# Altium PCB PANEL.PcbDoc
Units mm, origin at the board's own origin, x right, y up, seen from the top; angles counter-clockwise.
Board outline 149.8 x 132.8 mm, 4 copper layers (Top Layer, Int1 (GND), Int2 (GND), Bottom Layer), stack 1.583 mm thick; 3 components, 0 nets, 155 pads, 0 vias.
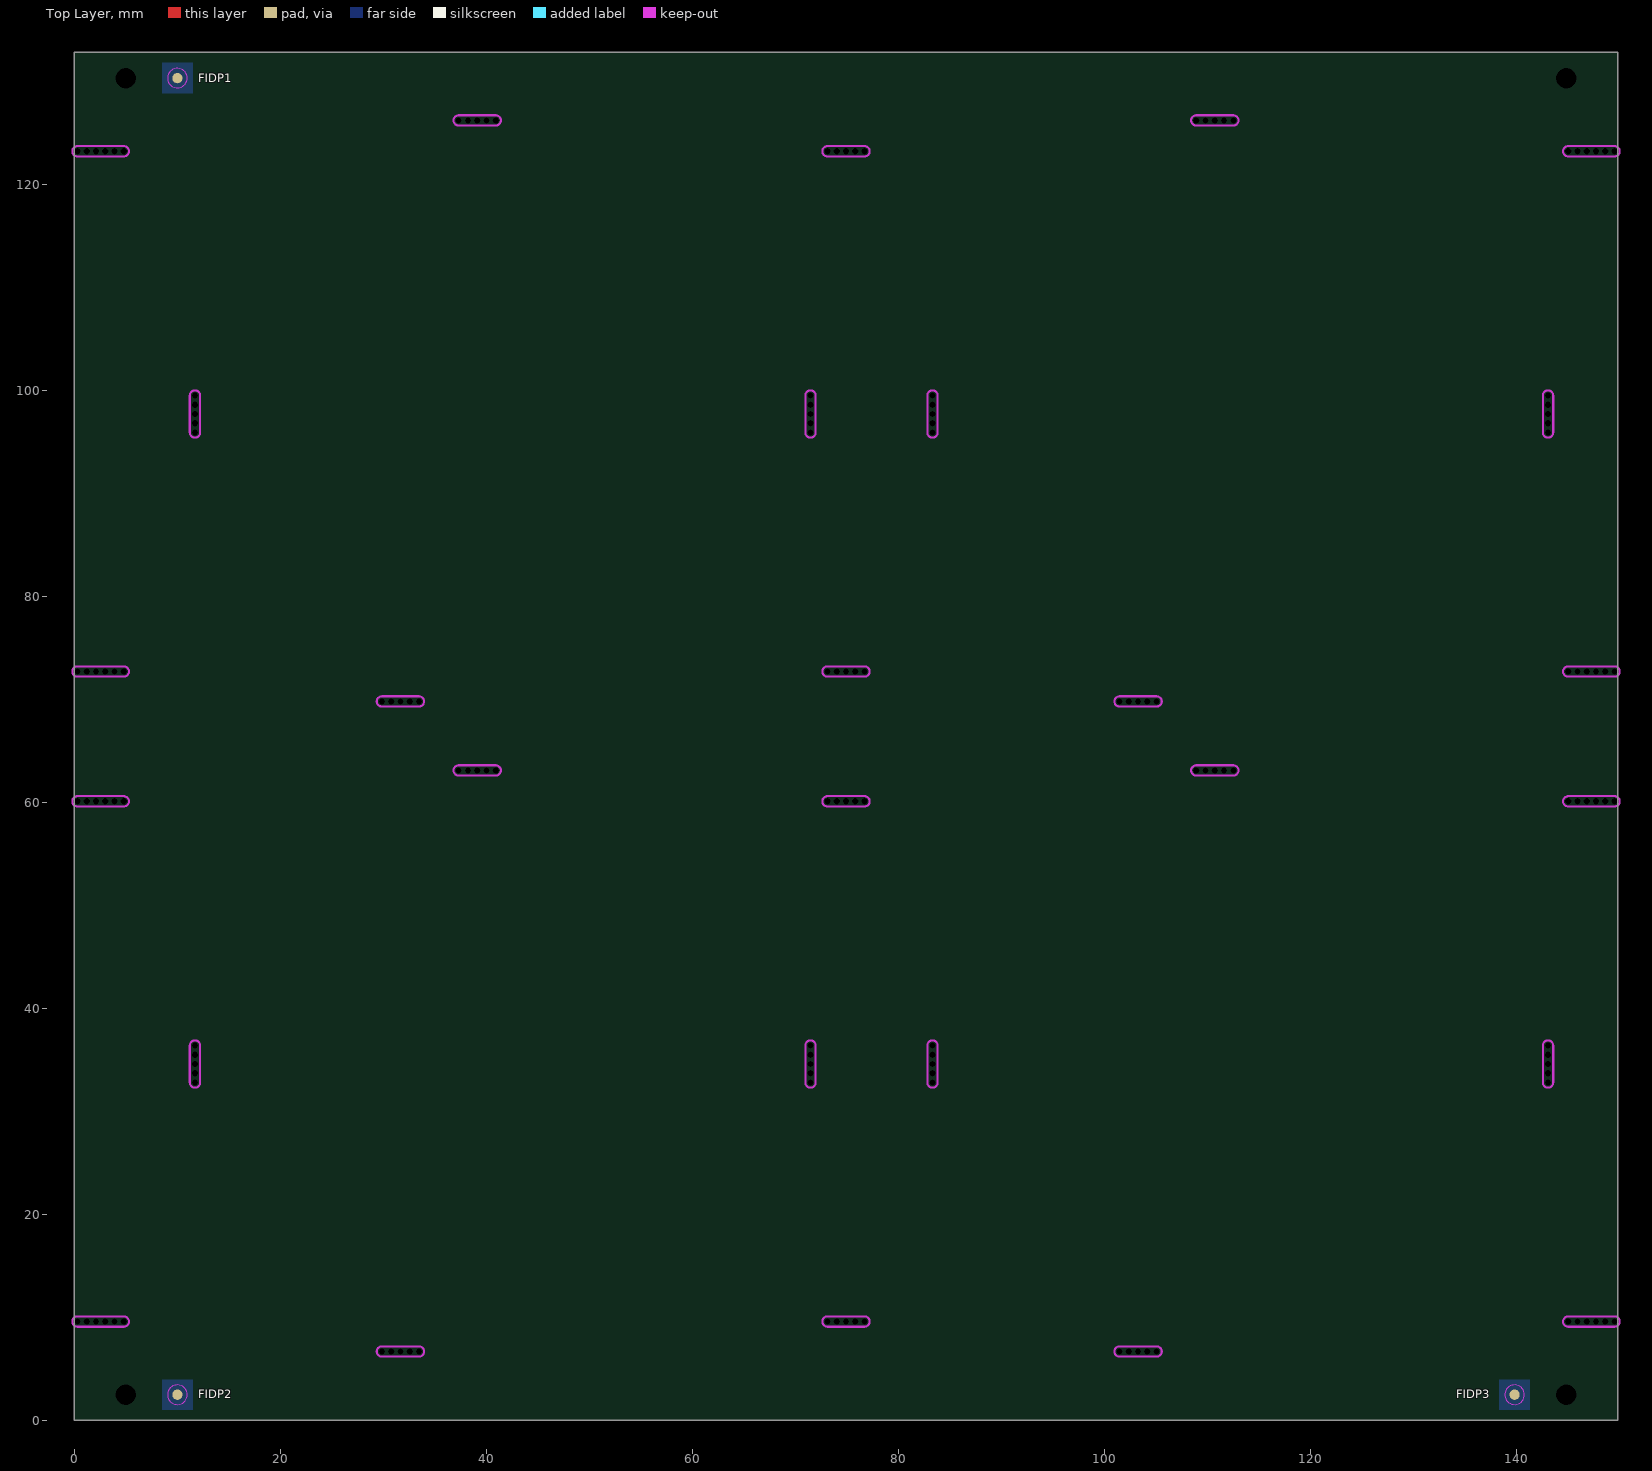
[diagram p0: Top Layer view]
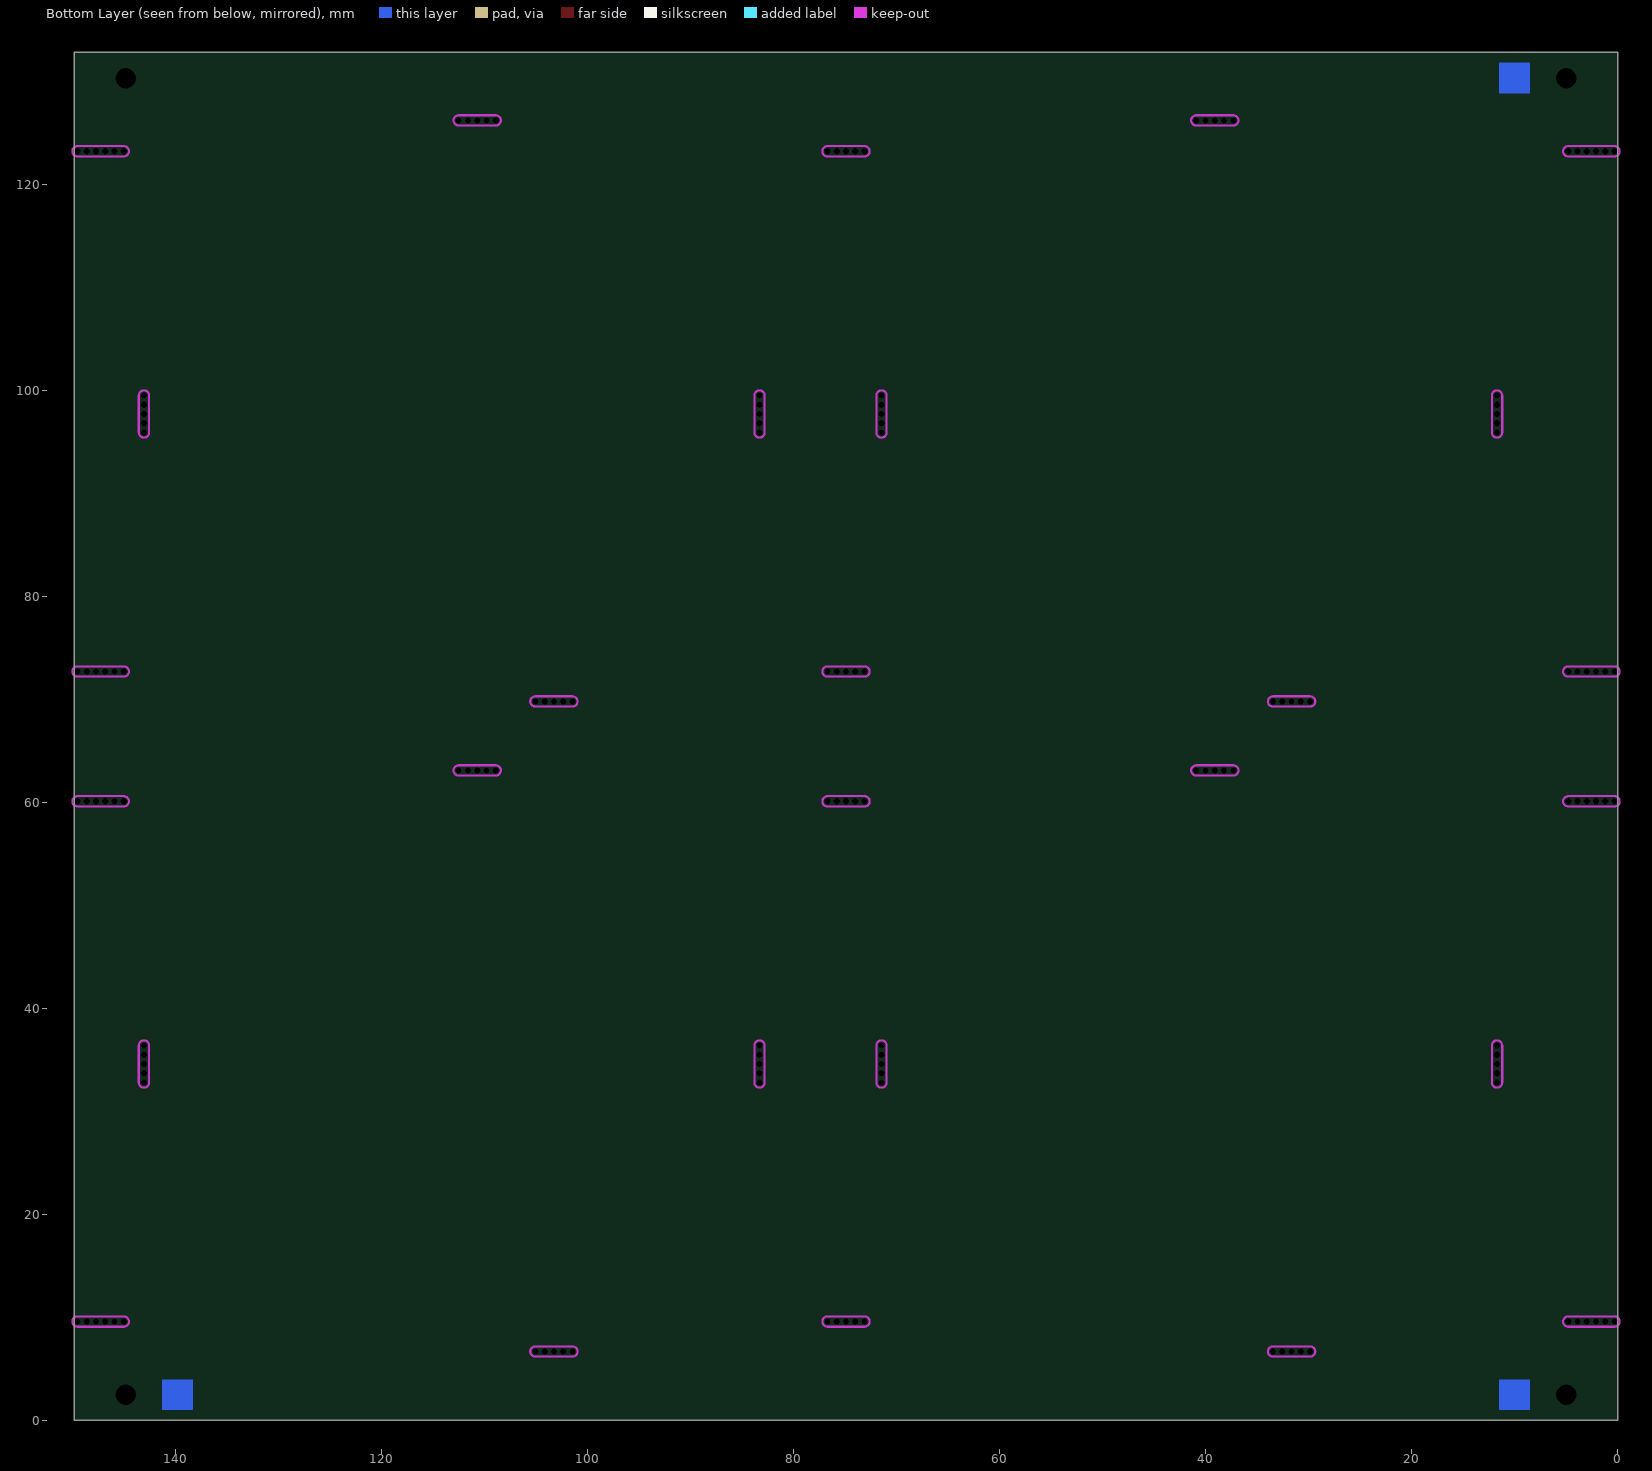
[diagram p1: Bottom Layer view, seen from below]
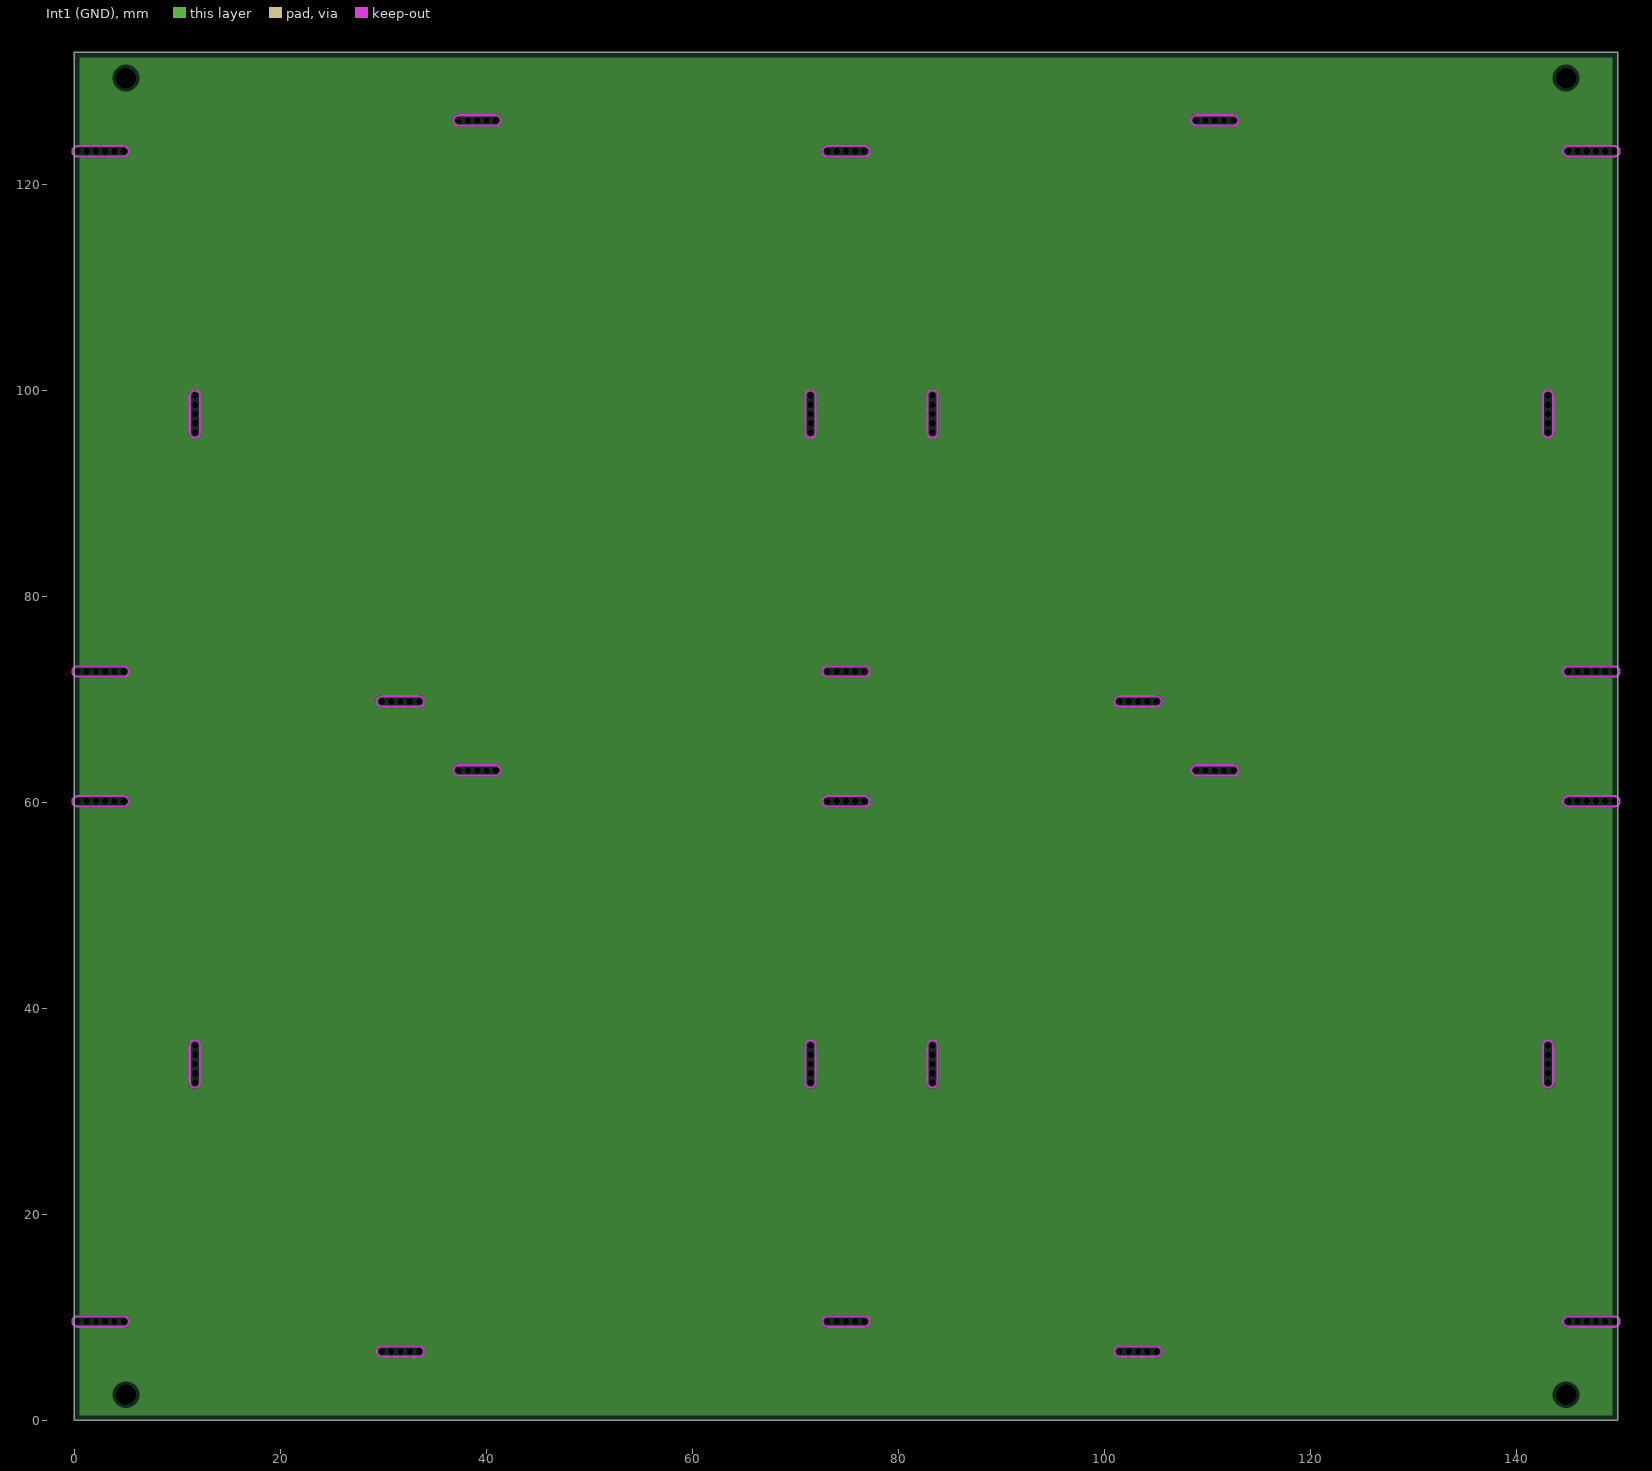
[diagram p2: Int1 (GND), clearances drawn from the general rule]
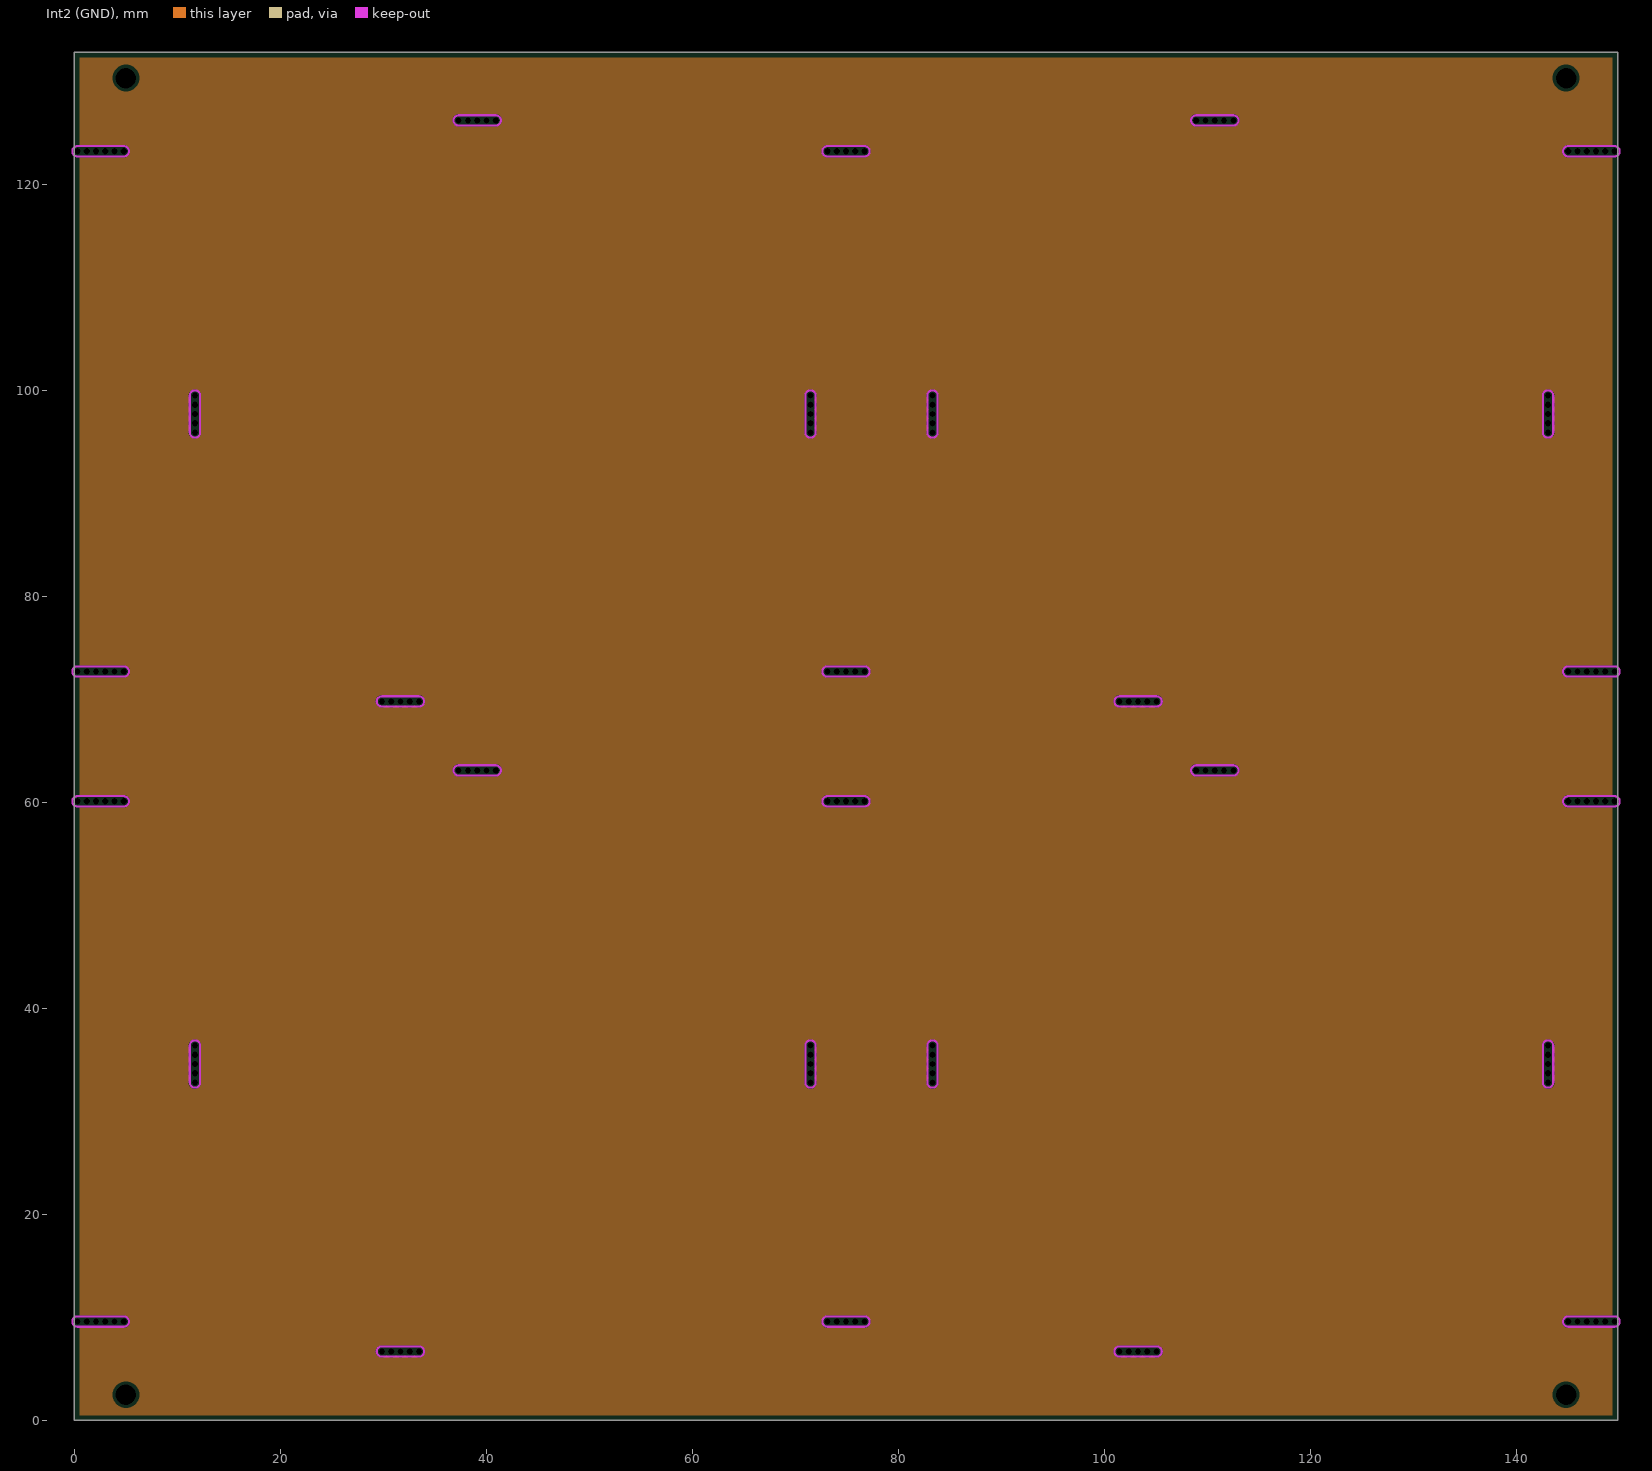
[diagram p3: Int2 (GND), clearances drawn from the general rule]

## Layer stack, top to bottom
Top Solder: solder mask 0.0254, SM-001, Dk 4
Top Layer: signal copper 0.035
Dielectric 1: prepreg 0.1067, PP-014, Dk 4.2
Int1 (GND): plane copper 0.0175, net GND
Dielectric 2: core 1.265, Core-039, Dk 4.8
Int2 (GND): plane copper 0.0175
Dielectric 3: prepreg 0.1067, PP-014, Dk 4.2
Bottom Layer: signal copper 0.035
Bottom Solder: solder mask 0.0254, SM-001, Dk 4

## Board outline
0,0 0,132.8 149.8,132.8 149.8,0

## Design rules (kind name [scope] priority, off if disabled: settings)
AcuteAngle [All] p1: minimum=6.00000000000000E+0001 checktracksonly=TRUE
AssemblyTestpoint [All] p1: testpointundercomponent=TRUE minsize=1 maxsize=2.5 preferedsize=1.5 minholesize=0 maxholesize=1 preferedholesize=0.8 testpointgrid=0.025 usegrid=TRUE gridtolerance=0 allowsidetop=TRUE allowsidebottom=TRUE
BoardOutlineClearance [(OnLayer('Top Layer') OR OnLayer('Bottom Layer'))] p1: gap=1 ignorepadtopadclearanceinfootprint=FALSE
Clearance [All] p1: gap=0.2 ignorepadtopadclearanceinfootprint=FALSE except(0: Arc-Hole Track-Hole SMDPad-Hole THPad-Hole Via-Hole Fill-Hole Poly-Hole Region-Hole Text-Hole)
ComponentClearance ComponentClearance_FID [Footprint Like('FID-1*')] p1: gap=0 collisioncheckmode=3 verticalgap=0 showdistances=FALSE
ComponentClearance [All] p2: gap=0.2 collisioncheckmode=3 verticalgap=0.2 showdistances=FALSE
DiffPairsRouting [All] p1: maxlimit=0.4 minlimit=0.2 mostfreqgap=0.2 toplayer_minwidth=0.3 toplayer_maxwidth=0.4 toplayer_prefwidth=0.3 bottomlayer_minwidth=0.3 bottomlayer_maxwidth=0.4 bottomlayer_prefwidth=0.3 maxuncoupledlength=12
FabricationTestpoint [All] p1: side=3 testpointundercomponent=TRUE minsize=1 maxsize=2.5 preferedsize=1.5 minholesize=0 maxholesize=1 preferedholesize=0.8 testpointgrid=0.025 allowsidetop=TRUE allowsidebottom=TRUE usegrid=TRUE gridtolerance=0
Height [All] p1: minheight=0 maxheight=50 prefheight=12
HoleSize [All] p1: absolutevalues=TRUE maxlimit=6 minlimit=0.3 maxpercent=80.000 minpercent=20.000
HoleToHoleClearance [All] p1: gap=0.3 allowstackedmicrovias=TRUE
MinimumAnnularRing [All] p1: minimumring=0.15
MinimumSolderMaskSliver [All] p1: minsoldermaskwidth=0.15
PlaneClearance [All] p1: clearance=0.3
PlaneConnect PlaneConnect_GND [(InNet('GND') and IsPad)] p1: pad.planeconnectstyle=Relief pad.reliefexpansion=0.3 pad.reliefentries=4 pad.reliefconductorwidth=0.5 pad.reliefairgap=0.2 via.planeconnectstyle=Direct via.reliefexpansion=0.3 via.reliefentries=4 via.reliefconductorwidth=0.5 via.reliefairgap=0.2
PlaneConnect [All] p2: planeconnectstyle=Direct reliefexpansion=0.5 reliefentries=4 reliefconductorwidth=0.2 reliefairgap=0.2
PolygonConnect [All] p1: thpad.connectstyle=Relief thpad.reliefconductorwidth=0.4 thpad.reliefentries=4 thpad.polygonreliefangle="90 Angle" thpad.airgapwidth=0.2 smdpad.connectstyle=Direct smdpad.reliefconductorwidth=0.3 smdpad.reliefentries=4 smdpad.polygonreliefangle="90 Angle" smdpad.airgapwidth=0.2 via.connectstyle=Direct via.reliefconductorwidth=0.2 via.reliefentries=4 via.polygonreliefangle="90 Angle" via.airgapwidth=0.2
RoutingCorners [All] p1: cornerstyle=45-Degree minsetback=0.5 maxsetback=2
RoutingVias [All] p1: holewidth=0.3 width=0.6 viastyle="Through Hole" minholewidth=0.3 minwidth=0.6 maxholewidth=0.6 maxwidth=1
SMDEntry [All] p1: side=TRUE corner=TRUE anyangle=TRUE
SMDToCorner [All] p1: distance=0
SilkToSilkClearance [All] p1: silktosilkclearance=0.1
SilkToSolderMaskClearance [IsPad] p1: minsilkscreentomaskgap=0.1 clearancetoexposedcopper=FALSE
SolderMaskExpansion SolderMaskExpansion-NPTH [PadIsPlated = 'False'] p1: expansion=0.1 soldermaskfromhole=TRUE
SolderMaskExpansion [All] p2: expansion=0.05
SupplyNets SupplyNets_GND [InNet('GND')] p1: voltage=0.000
SupplyNets SupplyNets+5V [InNet('+5V')] p2: voltage=5.000
SupplyNets SupplyNets+3V3 [InNet('+3V3')] p3: voltage=3.300
UnRoutedNet [All] p1: checkbadconnections=TRUE
Width [All] p1: maxlimit=5 minlimit=0.2 preferedwidth=0.2 minimp=50.000000 maximp=50.000000 favimp=50.000000
16 further rules are at their usual default settings.

## Components (designator, comment, footprint, x,y, rotation, side; value= is the part's Value field where it differs from the comment)
FIDP1 "Panel Fiducial" FID-1-2MM 10,130.3 r0 top
FIDP2 "Panel Fiducial" FID-1-2MM 10,2.5 r0 top
FIDP3 "Panel Fiducial" FID-1-2MM 139.8,2.5 r180 top

## Footprints (in the part's own frame and the unit in brackets; to place one, negate y for a bottom-side part, rotate by r counter-clockwise, add the part's x,y. Pads: shape width x height; smd on the part's side, far side on the other; paste and mask are expansions set on the pad)
FID-1-2MM [mm] "Fiducial 1.0mm Diameter, 2.0mm Mask"
  round 1 smd paste-1 mask+0.5: F(0,0)
  Top Layer keep-out circle w0.1: c0,0 r0.95

## Free pads (board coordinates)
  round 0 hole 0.6 unplated mask+0.2: MB(0.3,9.6) MB(0.3,60.1) MB(0.3,72.7) MB(0.3,123.2) MB(1.2,9.6) MB(1.2,60.1) MB(1.2,72.7) MB(1.2,123.2) MB(2.1,9.6) MB(2.1,60.1) MB(2.1,72.7) MB(2.1,123.2) MB(3,9.6) MB(3,60.1) MB(3,72.7) MB(3,123.2) MB(3.9,9.6) MB(3.9,60.1) MB(3.9,72.7) MB(3.9,123.2) MB(4.8,9.6) MB(4.8,60.1) MB(4.8,72.7) MB(4.8,123.2) MB(11.7,32.8) MB(11.7,33.7) MB(11.7,34.6) MB(11.7,35.5) MB(11.7,36.4) MB(11.7,95.9) MB(11.7,96.8) MB(11.7,97.7) MB(11.7,98.6) MB(11.7,99.5) MB(29.85,6.7) MB(29.85,69.8) MB(30.75,6.7) MB(30.75,69.8) MB(31.65,6.7) MB(31.65,69.8) MB(32.55,6.7) MB(32.55,69.8) MB(33.45,6.7) MB(33.45,69.8) MB(37.3,63.1) MB(37.3,126.2) MB(38.2,63.1) MB(38.2,126.2) MB(39.1,63.1) MB(39.1,126.2) MB(40,63.1) MB(40,126.2) MB(40.9,63.1) MB(40.9,126.2) MB(71.45,32.8) MB(71.45,33.7) MB(71.45,34.6) MB(71.45,35.5) MB(71.45,36.4) MB(71.45,95.9) MB(71.45,96.8) MB(71.45,97.7) MB(71.45,98.6) MB(71.45,99.5) MB(73.1,9.6) MB(73.1,60.1) MB(73.1,72.7) MB(73.1,123.2) MB(74,9.6) MB(74,60.1) MB(74,72.7) MB(74,123.2) MB(74.9,9.6) MB(74.9,60.1) MB(74.9,72.7) MB(74.9,123.2) MB(75.8,9.6) MB(75.8,60.1) MB(75.8,72.7) MB(75.8,123.2) MB(76.7,9.6) MB(76.7,60.1) MB(76.7,72.7) MB(76.7,123.2) MB(83.3,32.8) MB(83.3,33.7) MB(83.3,34.6) MB(83.3,35.5) MB(83.3,36.4) MB(83.3,95.9) MB(83.3,96.8) MB(83.3,97.7) MB(83.3,98.6) MB(83.3,99.5) MB(101.45,6.7) MB(101.45,69.8) MB(102.35,6.7) MB(102.35,69.8) MB(103.25,6.7) MB(103.25,69.8) MB(104.15,6.7) MB(104.15,69.8) MB(105.05,6.7) MB(105.05,69.8) MB(108.9,63.1) MB(108.9,126.2) MB(109.8,63.1) MB(109.8,126.2) MB(110.7,63.1) MB(110.7,126.2) MB(111.6,63.1) MB(111.6,126.2) MB(112.5,63.1) MB(112.5,126.2) MB(143.05,32.8) MB(143.05,33.7) MB(143.05,34.6) MB(143.05,35.5) MB(143.05,36.4) MB(143.05,95.9) MB(143.05,96.8) MB(143.05,97.7) MB(143.05,98.6) MB(143.05,99.5) MB(145,9.6) MB(145,60.1) MB(145,72.7) MB(145,123.2) MB(145.9,9.6) MB(145.9,60.1) MB(145.9,72.7) MB(145.9,123.2) MB(146.8,9.6) MB(146.8,60.1) MB(146.8,72.7) MB(146.8,123.2) MB(147.7,9.6) MB(147.7,60.1) MB(147.7,72.7) MB(147.7,123.2) MB(148.6,9.6) MB(148.6,60.1) MB(148.6,72.7) MB(148.6,123.2) MB(149.5,9.6) MB(149.5,60.1) MB(149.5,72.7) MB(149.5,123.2)
  round 0 hole 2 unplated: RH(5,2.5) RH(5,130.3) RH(144.8,2.5) RH(144.8,130.3)

## Nets (pads, with @x,y where several pads share a name; then routed paths per layer and width w, separated by ;. In a path a pad name is that pad's centre, name@x,y a point inside that pad or via, vN(x,y) a via of type N, cw(c..) or ccw(c..) an arc to the next point about the centre after c; other vN are vias at no path point)
pads on no net: FIDP1.F FIDP2.F FIDP3.F

## Polygon pours and split planes (outlines as drawn)
no net on Int1 (GND) (split plane): 181 vertices, not listed, extent 0.51,0.51 149.29,132.29
no net on Int2 (GND) (split plane): 181 vertices, not listed, extent 0.51,0.51 149.29,132.29

## Keep-outs
Keep-Out Layer:
  lines w0.2: 0.3,9.1 cw(c0.3,9.6) 0.3,10.1 4.8,10.1 cw(c4.8,9.6) 4.8,9.1 0.3,9.1 ; 0.3,59.6 cw(c0.3,60.1) 0.3,60.6 4.8,60.6 cw(c4.8,60.1) 4.8,59.6 0.3,59.6 ; 0.3,72.2 cw(c0.3,72.7) 0.3,73.2 4.8,73.2 cw(c4.8,72.7) 4.8,72.2 0.3,72.2 ; 0.3,122.7 cw(c0.3,123.2) 0.3,123.7 4.8,123.7 cw(c4.8,123.2) 4.8,122.7 0.3,122.7 ; 11.2,32.8 ccw(c11.7,32.8) 12.2,32.8 12.2,36.4 ccw(c11.7,36.4) 11.2,36.4 11.2,32.8 ; 11.2,95.9 ccw(c11.7,95.9) 12.2,95.9 12.2,99.5 ccw(c11.7,99.5) 11.2,99.5 11.2,95.9 ; 29.85,6.2 cw(c29.85,6.7) 29.85,7.2 33.45,7.2 cw(c33.45,6.7) 33.45,6.2 29.85,6.2 ; 29.85,69.3 cw(c29.85,69.8) 29.85,70.3 33.45,70.3 cw(c33.45,69.8) 33.45,69.3 29.85,69.3 ; 37.3,62.6 cw(c37.3,63.1) 37.3,63.6 40.9,63.6 cw(c40.9,63.1) 40.9,62.6 37.3,62.6 ; 37.3,125.7 cw(c37.3,126.2) 37.3,126.7 40.9,126.7 cw(c40.9,126.2) 40.9,125.7 37.3,125.7 ; 70.95,32.8 ccw(c71.45,32.8) 71.95,32.8 71.95,36.4 ccw(c71.45,36.4) 70.95,36.4 70.95,32.8 ; 70.95,95.9 ccw(c71.45,95.9) 71.95,95.9 71.95,99.5 ccw(c71.45,99.5) 70.95,99.5 70.95,95.9 ; 73.1,9.1 cw(c73.1,9.6) 73.1,10.1 76.7,10.1 cw(c76.7,9.6) 76.7,9.1 73.1,9.1 ; 73.1,59.6 cw(c73.1,60.1) 73.1,60.6 76.7,60.6 cw(c76.7,60.1) 76.7,59.6 73.1,59.6 ; 73.1,72.2 cw(c73.1,72.7) 73.1,73.2 76.7,73.2 cw(c76.7,72.7) 76.7,72.2 73.1,72.2 ; 73.1,122.7 cw(c73.1,123.2) 73.1,123.7 76.7,123.7 cw(c76.7,123.2) 76.7,122.7 73.1,122.7 ; 82.8,32.8 ccw(c83.3,32.8) 83.8,32.8 83.8,36.4 ccw(c83.3,36.4) 82.8,36.4 82.8,32.8 ; 82.8,95.9 ccw(c83.3,95.9) 83.8,95.9 83.8,99.5 ccw(c83.3,99.5) 82.8,99.5 82.8,95.9 ; 101.45,6.2 cw(c101.45,6.7) 101.45,7.2 105.05,7.2 cw(c105.05,6.7) 105.05,6.2 101.45,6.2 ; 101.45,69.3 cw(c101.45,69.8) 101.45,70.3 105.05,70.3 cw(c105.05,69.8) 105.05,69.3 101.45,69.3 ; 108.9,62.6 cw(c108.9,63.1) 108.9,63.6 112.5,63.6 cw(c112.5,63.1) 112.5,62.6 108.9,62.6 ; 108.9,125.7 cw(c108.9,126.2) 108.9,126.7 112.5,126.7 cw(c112.5,126.2) 112.5,125.7 108.9,125.7 ; 142.55,32.8 ccw(c143.05,32.8) 143.55,32.8 143.55,36.4 ccw(c143.05,36.4) 142.55,36.4 142.55,32.8 ; 142.55,95.9 ccw(c143.05,95.9) 143.55,95.9 143.55,99.5 ccw(c143.05,99.5) 142.55,99.5 142.55,95.9 ; 145,9.1 cw(c145,9.6) 145,10.1 149.5,10.1 cw(c149.5,9.6) 149.5,9.1 145,9.1 ; 145,59.6 cw(c145,60.1) 145,60.6 149.5,60.6 cw(c149.5,60.1) 149.5,59.6 145,59.6 ; 145,72.2 cw(c145,72.7) 145,73.2 149.5,73.2 cw(c149.5,72.7) 149.5,72.2 145,72.2 ; 145,122.7 cw(c145,123.2) 145,123.7 149.5,123.7 cw(c149.5,123.2) 149.5,122.7 145,122.7

## Other copper
Bottom Layer:
  region: 141.3,4 138.3,4 138.3,1 141.3,1
  rectangle: 8.5,128.8 11.5,131.8
  rectangle: 8.5,1 11.5,4
Int1 (GND) (plane layer: these items are gaps in the copper):
  lines w0.2: 0.3,9.1 4.8,9.1 ; 0.3,10.1 4.8,10.1 ; 0.3,59.6 4.8,59.6 ; 0.3,60.6 4.8,60.6 ; 0.3,72.2 4.8,72.2 ; 0.3,73.2 4.8,73.2 ; 0.3,122.7 4.8,122.7 ; 0.3,123.7 4.8,123.7 ; 12.2,32.8 12.2,36.4 ; 12.2,95.9 12.2,99.5 ; 29.85,7.2 33.45,7.2 ; 29.85,70.3 33.45,70.3 ; 37.3,62.6 40.9,62.6 ; 37.3,63.6 40.9,63.6 ; 37.3,125.7 40.9,125.7 ; 37.3,126.7 40.9,126.7 ; 70.95,32.8 70.95,36.4 ; 70.95,95.9 70.95,99.5 ; 73.1,9.1 76.7,9.1 ; 73.1,10.1 76.7,10.1 ; 73.1,59.6 76.7,59.6 ; 73.1,60.6 76.7,60.6 ; 73.1,72.2 76.7,72.2 ; 73.1,73.2 76.7,73.2 ; 73.1,122.7 76.7,122.7 ; 73.1,123.7 76.7,123.7 ; 83.8,32.8 83.8,36.4 ; 83.8,95.9 83.8,99.5 ; 101.45,7.2 105.05,7.2 ; 101.45,70.3 105.05,70.3 ; 108.9,62.6 112.5,62.6 ; 108.9,63.6 112.5,63.6 ; 108.9,125.7 112.5,125.7 ; 108.9,126.7 112.5,126.7 ; 142.55,32.8 142.55,36.4 ; 142.55,95.9 142.55,99.5 ; 145,9.1 149.5,9.1 ; 145,10.1 149.5,10.1 ; 145,59.6 149.5,59.6 ; 145,60.6 149.5,60.6 ; 145,72.2 149.5,72.2 ; 145,73.2 149.5,73.2 ; 145,122.7 149.5,122.7 ; 145,123.7 149.5,123.7
Int2 (GND) (plane layer: these items are gaps in the copper):
  lines w0.2: 0.3,9.1 4.8,9.1 ; 0.3,10.1 4.8,10.1 ; 0.3,59.6 4.8,59.6 ; 0.3,60.6 4.8,60.6 ; 0.3,72.2 4.8,72.2 ; 0.3,73.2 4.8,73.2 ; 0.3,122.7 4.8,122.7 ; 0.3,123.7 4.8,123.7 ; 12.2,32.8 12.2,36.4 ; 12.2,95.9 12.2,99.5 ; 29.85,7.2 33.45,7.2 ; 29.85,70.3 33.45,70.3 ; 37.3,62.6 40.9,62.6 ; 37.3,63.6 40.9,63.6 ; 37.3,125.7 40.9,125.7 ; 37.3,126.7 40.9,126.7 ; 70.95,32.8 70.95,36.4 ; 70.95,95.9 70.95,99.5 ; 73.1,9.1 76.7,9.1 ; 73.1,10.1 76.7,10.1 ; 73.1,59.6 76.7,59.6 ; 73.1,60.6 76.7,60.6 ; 73.1,72.2 76.7,72.2 ; 73.1,73.2 76.7,73.2 ; 73.1,122.7 76.7,122.7 ; 73.1,123.7 76.7,123.7 ; 83.8,32.8 83.8,36.4 ; 83.8,95.9 83.8,99.5 ; 101.45,7.2 105.05,7.2 ; 101.45,70.3 105.05,70.3 ; 108.9,62.6 112.5,62.6 ; 108.9,63.6 112.5,63.6 ; 108.9,125.7 112.5,125.7 ; 108.9,126.7 112.5,126.7 ; 142.55,32.8 142.55,36.4 ; 142.55,95.9 142.55,99.5 ; 145,9.1 149.5,9.1 ; 145,10.1 149.5,10.1 ; 145,59.6 149.5,59.6 ; 145,60.6 149.5,60.6 ; 145,72.2 149.5,72.2 ; 145,73.2 149.5,73.2 ; 145,122.7 149.5,122.7 ; 145,123.7 149.5,123.7

## Silkscreen, mask and mechanical layers (free items; w line width, h text height)
Top Solder:
  region: 76.7,122.7 76.7,123.7 73.1,123.7 73.1,122.7
  region: 0.3,123.7 0.3,122.7 4.8,122.7 4.8,123.7
  region: 149.5,122.7 149.5,123.7 145,123.7 145,122.7
  region: 76.7,72.2 76.7,73.2 73.1,73.2 73.1,72.2
  region: 0.3,73.2 0.3,72.2 4.8,72.2 4.8,73.2
  region: 149.5,72.2 149.5,73.2 145,73.2 145,72.2
  region: 76.7,59.6 76.7,60.6 73.1,60.6 73.1,59.6
  region: 0.3,60.6 0.3,59.6 4.8,59.6 4.8,60.6
  region: 149.5,59.6 149.5,60.6 145,60.6 145,59.6
  region: 149.5,9.1 149.5,10.1 145,10.1 145,9.1
  region: 0.3,10.1 0.3,9.1 4.8,9.1 4.8,10.1
  region: 76.7,9.1 76.7,10.1 73.1,10.1 73.1,9.1
  region: 83.8,99.5 82.8,99.5 82.8,95.9 83.8,95.9
  region: 112.5,125.7 112.5,126.7 108.9,126.7 108.9,125.7
  rectangle: 142.55,95.9 143.55,99.5
  region: 101.45,70.3 101.45,69.3 105.05,69.3 105.05,70.3
  region: 101.45,7.2 101.45,6.2 105.05,6.2 105.05,7.2
  rectangle: 142.55,32.8 143.55,36.4
  region: 112.5,62.6 112.5,63.6 108.9,63.6 108.9,62.6
  region: 83.8,36.4 82.8,36.4 82.8,32.8 83.8,32.8
  region: 12.2,36.4 11.2,36.4 11.2,32.8 12.2,32.8
  region: 40.9,62.6 40.9,63.6 37.3,63.6 37.3,62.6
  rectangle: 70.95,32.8 71.95,36.4
  region: 29.85,7.2 29.85,6.2 33.45,6.2 33.45,7.2
  region: 29.85,70.3 29.85,69.3 33.45,69.3 33.45,70.3
  rectangle: 70.95,95.9 71.95,99.5
  region: 40.9,125.7 40.9,126.7 37.3,126.7 37.3,125.7
  region: 12.2,99.5 11.2,99.5 11.2,95.9 12.2,95.9
Bottom Solder:
  region: 76.7,122.7 76.7,123.7 73.1,123.7 73.1,122.7
  region: 0.3,123.7 0.3,122.7 4.8,122.7 4.8,123.7
  region: 149.5,122.7 149.5,123.7 145,123.7 145,122.7
  region: 76.7,72.2 76.7,73.2 73.1,73.2 73.1,72.2
  region: 0.3,73.2 0.3,72.2 4.8,72.2 4.8,73.2
  region: 149.5,72.2 149.5,73.2 145,73.2 145,72.2
  region: 76.7,59.6 76.7,60.6 73.1,60.6 73.1,59.6
  region: 0.3,60.6 0.3,59.6 4.8,59.6 4.8,60.6
  region: 149.5,59.6 149.5,60.6 145,60.6 145,59.6
  region: 149.5,9.1 149.5,10.1 145,10.1 145,9.1
  region: 0.3,10.1 0.3,9.1 4.8,9.1 4.8,10.1
  region: 76.7,9.1 76.7,10.1 73.1,10.1 73.1,9.1
  region: 83.8,99.5 82.8,99.5 82.8,95.9 83.8,95.9
  region: 112.5,125.7 112.5,126.7 108.9,126.7 108.9,125.7
  rectangle: 142.55,95.9 143.55,99.5
  region: 101.45,70.3 101.45,69.3 105.05,69.3 105.05,70.3
  region: 101.45,7.2 101.45,6.2 105.05,6.2 105.05,7.2
  rectangle: 142.55,32.8 143.55,36.4
  region: 112.5,62.6 112.5,63.6 108.9,63.6 108.9,62.6
  region: 83.8,36.4 82.8,36.4 82.8,32.8 83.8,32.8
  region: 12.2,36.4 11.2,36.4 11.2,32.8 12.2,32.8
  region: 40.9,62.6 40.9,63.6 37.3,63.6 37.3,62.6
  rectangle: 70.95,32.8 71.95,36.4
  region: 29.85,7.2 29.85,6.2 33.45,6.2 33.45,7.2
  region: 29.85,70.3 29.85,69.3 33.45,69.3 33.45,70.3
  rectangle: 70.95,95.9 71.95,99.5
  region: 40.9,125.7 40.9,126.7 37.3,126.7 37.3,125.7
  region: 12.2,99.5 11.2,99.5 11.2,95.9 12.2,95.9
Panel Outline:
  drawing of 352 lines, arcs and shapes, not listed
Route Tool Path:
  lines w1.6: 5.8,44.1 ccw(c7.6,44.1) 7.6,42.3 10.6,42.3 cw(c10.6,42.1) 10.8,42.1 10.8,36.7 ; 5.8,44.6 5.8,60.1 cw(c9.6,60.1) 9.6,63.9 37.003,63.9 ; 5.8,107.2 ccw(c7.6,107.2) 7.6,105.4 10.6,105.4 cw(c10.6,105.2) 10.8,105.2 10.8,99.8 ; 5.8,107.7 5.8,123.2 cw(c9.6,123.2) 9.6,127 37.003,127 ; 10.8,32.5 10.8,27.1 cw(c10.6,27.1) 10.6,26.9 7.6,26.9 ccw(c7.6,25.1) 5.8,25.1 5.8,9.6 ccw(c9.6,9.6) 9.6,5.8 29.55,5.8 ; 10.8,95.6 10.8,90.2 cw(c10.6,90.2) 10.6,90 7.6,90 ccw(c7.6,88.2) 5.8,88.2 5.8,72.7 ccw(c9.6,72.7) 9.6,68.9 29.55,68.9 ; 33.75,5.8 68.6,5.8 ccw(c68.6,9.6) 72.4,9.6 ; 33.75,68.9 68.6,68.9 ccw(c68.6,72.7) 72.4,72.7 ; 41.197,63.9 68.6,63.9 cw(c68.6,60.1) 72.4,60.1 72.4,36.7 ; 41.197,127 68.6,127 cw(c68.6,123.2) 72.4,123.2 72.4,99.8 ; 72.4,9.6 72.4,32.5 ; 72.4,72.7 72.4,95.6 ; 77.4,44.1 ccw(c79.2,44.1) 79.2,42.3 82.2,42.3 cw(c82.2,42.1) 82.4,42.1 82.4,36.7 ; 77.4,44.6 77.4,60.1 cw(c81.2,60.1) 81.2,63.9 108.603,63.9 ; 77.4,107.2 ccw(c79.2,107.2) 79.2,105.4 82.2,105.4 cw(c82.2,105.2) 82.4,105.2 82.4,99.8 ; 77.4,107.7 77.4,123.2 cw(c81.2,123.2) 81.2,127 108.603,127 ; 82.4,32.5 82.4,27.1 cw(c82.2,27.1) 82.2,26.9 79.2,26.9 ccw(c79.2,25.1) 77.4,25.1 77.4,9.6 ccw(c81.2,9.6) 81.2,5.8 101.15,5.8 ; 82.4,95.6 82.4,90.2 cw(c82.2,90.2) 82.2,90 79.2,90 ccw(c79.2,88.2) 77.4,88.2 77.4,72.7 ccw(c81.2,72.7) 81.2,68.9 101.15,68.9 ; 105.35,5.8 140.2,5.8 ccw(c140.2,9.6) 144,9.6 144,32.5 ; 105.35,68.9 140.2,68.9 ccw(c140.2,72.7) 144,72.7 144,95.6 ; 112.797,63.9 140.2,63.9 cw(c140.2,60.1) 144,60.1 144,36.7 ; 112.797,127 140.2,127 cw(c140.2,123.2) 144,123.2 144,99.8
  lines w2: 43.55,53.9 51.85,53.9 ; 43.55,117 51.85,117 ; 43.6,53.9 43.6,29.5 51.85,29.5 ; 43.6,117 43.6,92.6 51.85,92.6 ; 51.6,10.6 51.6,25.6 ; 51.6,73.7 51.6,88.7 ; 55.35,29.5 63.6,29.5 63.6,39.95 ; 55.35,53.9 63.6,53.9 63.6,43.45 ; 55.35,92.6 63.6,92.6 63.6,103.05 ; 55.35,117 63.6,117 63.6,106.55 ; 115.15,53.9 123.45,53.9 ; 115.15,117 123.45,117 ; 115.2,53.9 115.2,29.5 123.45,29.5 ; 115.2,117 115.2,92.6 123.45,92.6 ; 123.2,10.6 123.2,25.6 ; 123.2,73.7 123.2,88.7 ; 126.95,29.5 135.2,29.5 135.2,39.95 ; 126.95,53.9 135.2,53.9 135.2,43.45 ; 126.95,92.6 135.2,92.6 135.2,103.05 ; 126.95,117 135.2,117 135.2,106.55

## Panel: embedded boards
"SCAP-PI.PcbDoc" at 6.6,6.6, 2 rows x 2 columns, spacing 63.1 x 71.6, rotation 0